# Altium PCB PCBdroneV21.PcbDoc
Units mm, origin at the board's own origin, x right, y up, seen from the top; angles counter-clockwise.
Board outline 46.33 x 95.58 mm, 2 copper layers (Top Layer, Bottom Layer); 53 components, 42 nets, 182 pads, 16 vias.
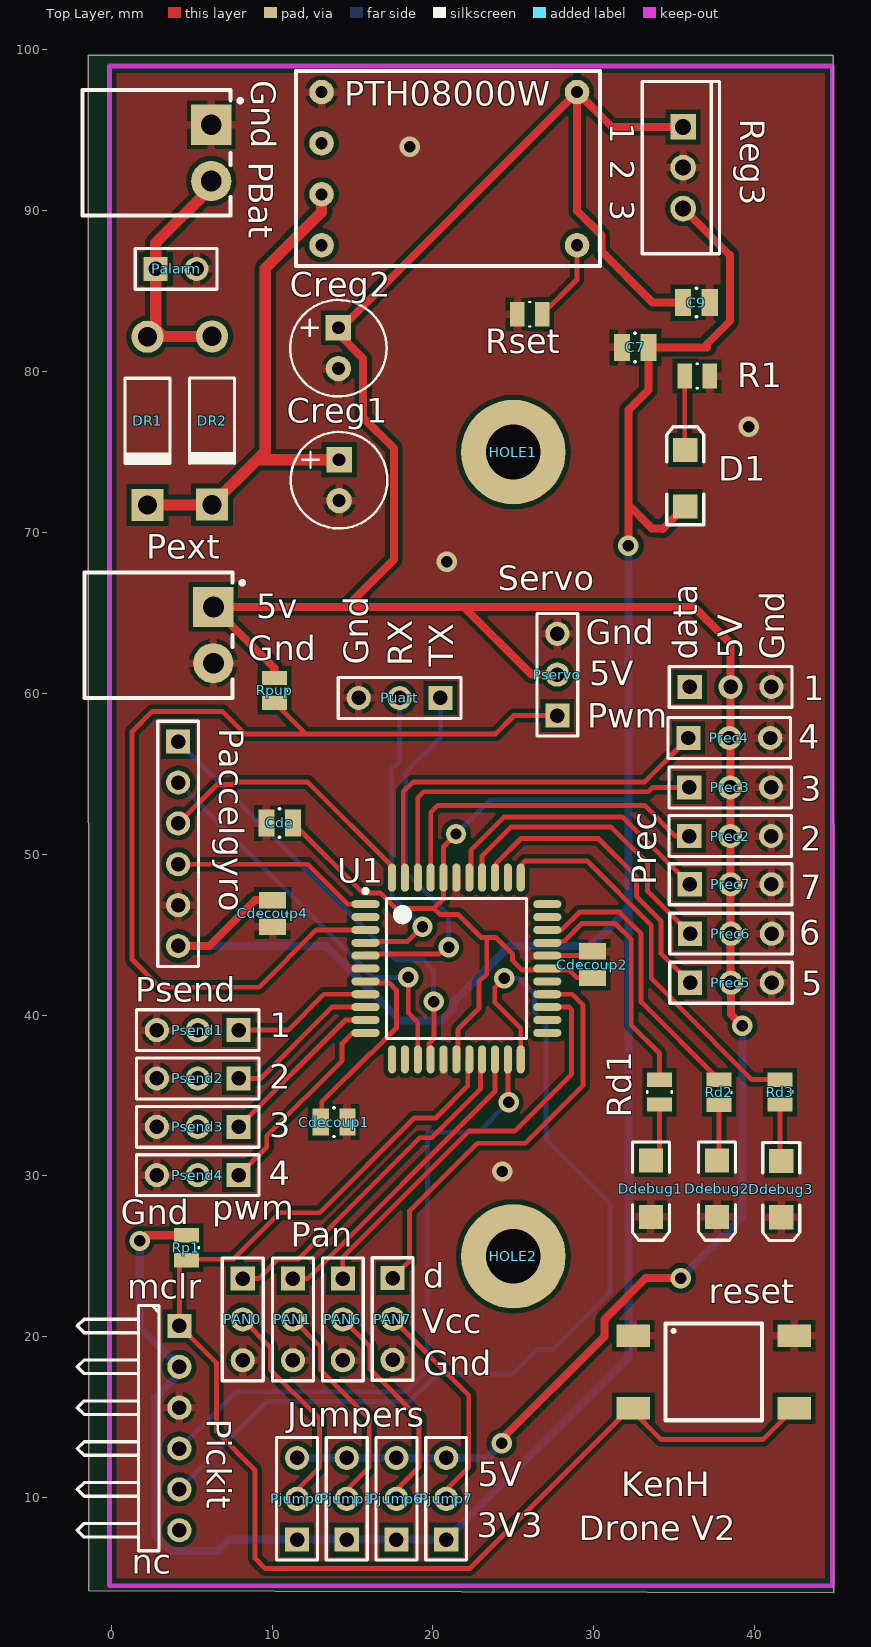
[diagram p0: Top Layer view]
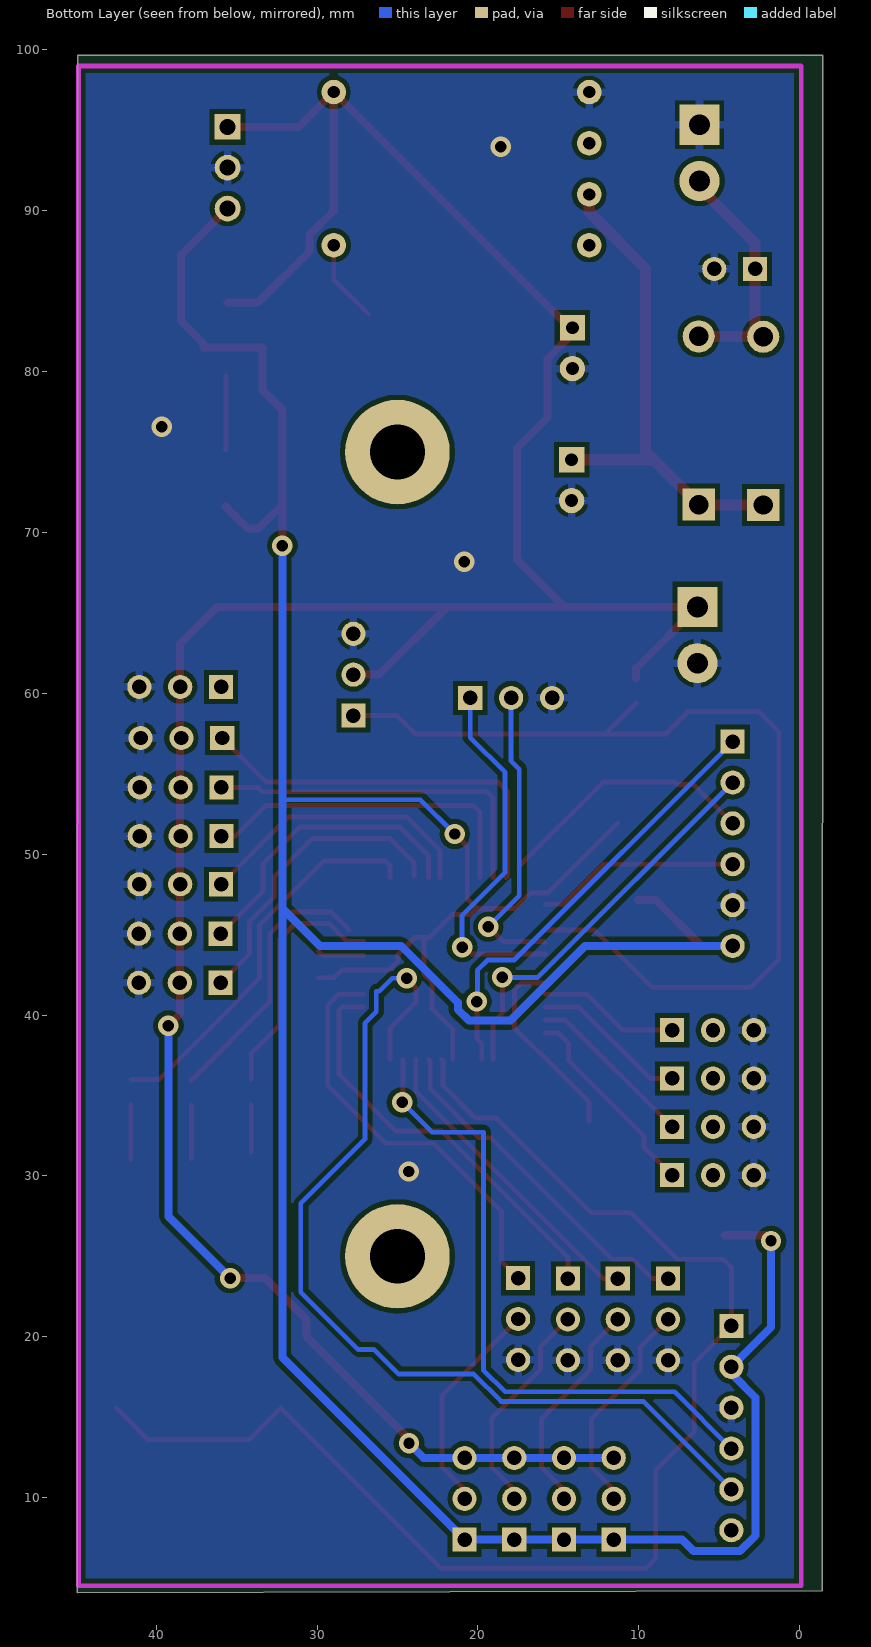
[diagram p1: Bottom Layer view, seen from below]
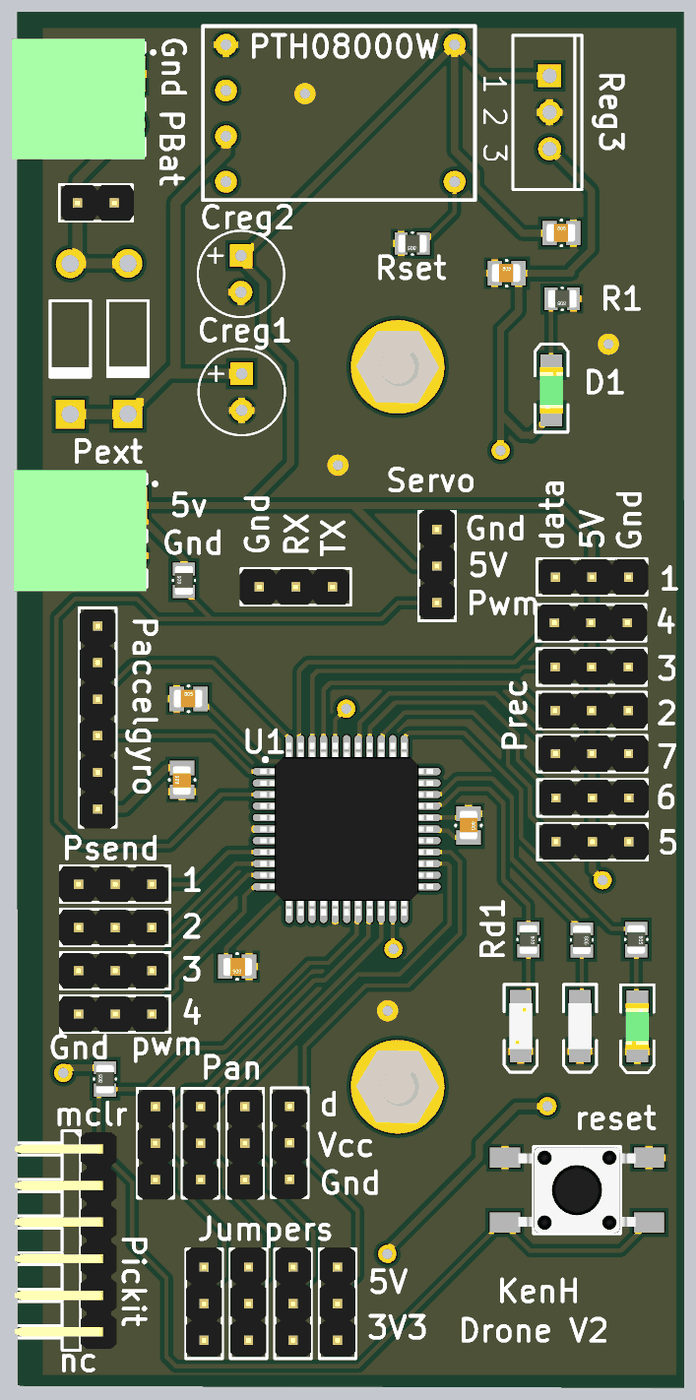
[diagram p2: 3D render of the assembled board from above, using the file's embedded part models]

## Layer stack, top to bottom
Top Solder: solder mask 0.0102, Solder Resist, Dk 3.5
Top Layer: signal copper 0.0356
Dielectric 1: dielectric 0.32, FR-4, Dk 4.8
Bottom Layer: signal copper 0.0356
Bottom Solder: solder mask 0.0102, Solder Resist, Dk 3.5

## Board outline
-1.397,4.216 44.907,4.089 44.882,99.67 -1.422,99.67

## Design rules (kind name [scope] priority, off if disabled: settings)
Clearance Clearance_1 [(InNet('5V') OR InNet('GND'))] p1: gap=0.3
Clearance [All] p2: gap=0.3
HoleSize [All] p1: absolutevalues=TRUE maxlimit=7 minlimit=0.025 maxpercent=80.000 minpercent=20.000
MinimumSolderMaskSliver [All] p1: minsoldermaskwidth=0.1
PolygonConnect [All] p1: connectstyle=Relief reliefconductorwidth=0.5 reliefentries=4 polygonreliefangle="90 Angle" airgapwidth=0.254
RoomDefinition DroneSch [InComponentClass('DroneSch')] p1: confinementstyle=ConfineIn formatcopy=TRUE lockcomponents=FALSE outline -4.826,4.724 44.704,4.724 44.704,98.679 -4.826,98.679
RoomDefinition DroneRegul [InComponentClass('DroneRegul')] p2: confinementstyle=ConfineIn formatcopy=TRUE lockcomponents=FALSE outline -4.826,68.931 39.243,68.931 39.243,99.03 -4.826,99.03
RoutingCorners [All] p1: cornerstyle=Round minsetback=2.54 maxsetback=2.54
RoutingVias [All] p1: holewidth=0.6 width=1 viastyle="Through Hole" minholewidth=0.711 minwidth=1.27 maxholewidth=0.711 maxwidth=1.27
SilkToSilkClearance [All] p1: silktosilkclearance=0.1
SilkToSolderMaskClearance [IsPad] p1: minsilkscreentomaskgap=0.254 clearancetoexposedcopper=FALSE
SolderMaskExpansion [All] p1: expansion=0.102
Width Width_2 [(InNet('BAT') OR InNet('NetDR1_1'))] p1: maxlimit=1 minlimit=0.7 preferedwidth=1
Width Width_1 [InNet('5V') OR InNet('3V3')] p2: maxlimit=0.7 minlimit=0.3 preferedwidth=0.5
Width [All] p3: maxlimit=0.3 minlimit=0.3 preferedwidth=0.3
25 further rules are at their usual default settings.

## Classes and differential pairs
component class DroneRegul: C7 C9 Creg1 Creg2 D1 DR1 DR2 Palarm Pbat PTH08000W R1 Reg3 Rset
component class DroneSch: Cde Cdecoup1 Cdecoup2 Cdecoup4 Ddebug1 Ddebug2 Ddebug3 HOLE1 HOLE2 Paccelgyro PAN0 PAN1 PAN6 PAN7 Pext Pickit Pjump0 Pjump1 Pjump6 Pjump7 Prec Prec2 Prec3 Prec4 Prec5 Prec6 Prec7 Psend1 Psend2 Psend3 Psend4 Pservo Puart Rd1 Rd2 Rd3 reset Rp1 Rpup U1

## Components (designator, comment, footprint, x,y, rotation, side; value= is the part's Value field where it differs from the comment)
C7 "CAP" C0805C 31.75,81.504 r0 top
C9 "CAP" C0805C 35.56,84.298 r0 top
Cde "CAP" C0805C 9.652,51.943 r0 top
Cdecoup1 "CAP" C0805C 14.681,33.35 r180 top
Cdecoup2 "CAP" C0805C 29.921,43.967 r270 top
Cdecoup4 "CAP" C0805C 10.033,45.491 r90 top
Creg1 "CAP Pol" RB.1/.3 14.173,74.524 r90 top
Creg2 "CAP Pol" RB.1/.3 14.122,82.728 r90 top
D1 "LED2" LED1206G 35.687,73.376 r90 top
Ddebug1 "LED" LED1206R 33.553,29.21 r270 top
Ddebug2 "LED" LED1206Y 37.668,29.21 r270 top
Ddebug3 "LED" LED1206G 41.656,29.185 r270 top
DR1 "Diode 1N4001" DO-41 2.261,76.937 r270 top
DR2 "Diode 1N4001" DO-41 6.274,76.962 r270 top
HOLE1 "Hole" SCREW 25,75 r0 top
HOLE2 "Hole" SCREW 25,25 r0 top
Paccelgyro "Header femelle" HDR1X6 4.166,56.998 r270 top
Palarm "alarme batterie faible" HDR1X2 2.769,86.385 r0 top
PAN0 "Header 3" HDR1X3 8.179,23.622 r270 top
PAN1 "Header 3" HDR1X3 11.303,23.622 r270 top
PAN6 "Header 3" HDR1X3 14.402,23.622 r270 top
PAN7 "Header 3" HDR1X3 17.501,23.647 r270 top
PBat "Batterie" TERM2W-3.5 6.223,95.347 r270 top (schematic designator P1)
Pext "Header 2" TERM2W-3.5 6.35,65.375 r270 top
Pickit "PICkit" HDR1X6H 4.242,20.676 r270 top
Pjump0 "Header 3" HDR1X3 11.557,7.391 r90 top
Pjump1 "Header 3" HDR1X3 14.647,7.391 r90 top
Pjump6 "Header 3" HDR1X3 17.738,7.391 r90 top
Pjump7 "Header 3" HDR1X3 20.828,7.391 r90 top
Prec "Header bat" HDR1X3 35.966,60.401 r0 top (schematic designator Prec1)
Prec2 "Header thro" HDR1X3 35.941,51.13 r0 top
Prec3 "Header aile" HDR1X3 35.941,54.153 r0 top
Prec4 "Header elev" HDR1X3 35.89,57.226 r0 top
Prec5 "Header rudd" HDR1X3 35.992,42.012 r0 top
Prec6 "Header gear" HDR1X3 35.992,45.06 r0 top
Prec7 "Header aux1" HDR1X3 35.966,48.133 r0 top
Psend1 "Header 3" HDR1X3 7.925,39.065 r180 top
Psend2 "Header 3" HDR1X3 7.925,36.06 r180 top
Psend3 "Header 3" HDR1X3 7.925,33.054 r180 top
Psend4 "Header 3" HDR1X3 7.925,30.048 r180 top
Pservo "Header 3" HDR1X3 27.737,58.623 r90 top
PTH08000W "Reg1" PTH08000W 13.081,97.379 r0 top
Puart "Header 3" HDR1X3 20.472,59.715 r180 top
R1 "RES" C0805R 37.211,79.726 r180 top
Rd1 "RES" C0805R 34.087,35.992 r270 top
Rd2 "RES" C0805R 37.795,35.966 r270 top
Rd3 "RES" C0805R 41.58,35.992 r270 top
Reg3 "LM2937IMP-3.3" TO-220-AB 35.56,92.68 r270 top
reset "SPST-NO" SPST-NO 32.461,20.066 r270 top
Rp1 "RES" C0805R 4.674,24.765 r90 top
Rpup "RES" C0805R 10.16,59.406 r90 top
Rset "RES" C0805R 26.797,83.566 r180 top
U1 "dsPIC33FJ64MC804-I/PT" TQFP-PT44_N 21.463,42.896 r0 top

## Footprints (in the part's own frame and the unit in brackets; to place one, negate y for a bottom-side part, rotate by r counter-clockwise, add the part's x,y. Pads: shape width x height; smd on the part's side, far side on the other; paste and mask are expansions set on the pad)
C0805C [mm]
  rect 1x1.7 smd: 1(0,0) 2(1.65,0)
  silkscreen extent 0.8,-0.89 0.85,0.89, body extent -0.21,-0.61 1.79,0.64, height 0.78
C0805R [mm]
  rect 0.9x1.55 smd: 1(0,0) 2(1.55,0)
  silkscreen extent 0.73,-0.76 0.81,0.76, body extent -0.24,-0.62 1.76,0.63, height 0.78
DO-41 [mm] "Diode, Axial; Body 5.2 x 2.7 mm (LxDia. max), Lead Dia. 0.86 mm (max)"
  round 2 hole 1.2: 1(-5.23,0)
  rect 2x2 hole 1.2: 2(5.23,0)
  silkscreen extent -2.65,-1.4 2.75,1.4
HDR1X2 [mm] "Connector; Header; 2 Position"
  rect 1.5x1.5 hole 0.9: 1(0,0)
  round 1.5 hole 0.9: 2(2.54,0)
  silkscreen extent -1.27,-1.27 3.81,1.27, body extent -1.17,-1.25 3.91,1.25, height 8.2
HDR1X3 [mm] "Connector; Header; 3 Position"
  rect 1.5x1.5 hole 0.9: 1(0,0)
  round 1.5 hole 0.9: 2(2.54,0) 3(5.08,0)
  silkscreen extent -1.27,-1.27 6.35,1.27, body extent -1.17,-1.25 6.45,1.25, height 8.2
HDR1X6 [mm] "Connector; Header; 6 Position"
  rect 1.5x1.5 hole 0.9: 1(0,0)
  round 1.5 hole 0.9: 2(2.54,0) 3(5.08,0) 4(7.62,0) 5(10.16,0) 6(12.7,0)
  silkscreen extent -1.27,-1.27 13.97,1.27, body extent -1.17,-1.25 14.07,1.25, height 8.2
HDR1X6H [mm] "Connector; Header; 6 Position; Right Angle"
  rect 1.5x1.5 hole 0.9: 1(0,0)
  round 1.5 hole 0.9: 2(2.54,0) 3(5.08,0) 4(7.62,0) 5(10.16,0) 6(12.7,0)
  silkscreen extent -1.27,-6.35 13.97,-1.27, body extent -1.17,-5.85 13.87,1.25, height 5.42
LED1206G [mm] "SMT LED; 2 Flat Leads; 3.2X1.6X1.1"
  rect 1.5x1.5 smd: 1(-1.75,0) 2(1.75,0)
  silkscreen extent -2.9,-1.15 3.2,1.15, body extent -1.6,-0.8 1.6,0.8, height 1.11
LED1206R [mm] "SMT LED; 2 Flat Leads; 3.2X1.6X1.1"
  rect 1.5x1.5 smd: 1(-1.75,0) 2(1.75,0)
  silkscreen extent -2.9,-1.15 3.2,1.15, body extent -1.6,-0.8 1.6,0.8, height 1.11
LED1206Y [mm] "SMT LED; 2 Flat Leads; 3.2X1.6X1.1"
  rect 1.5x1.5 smd: 1(-1.75,0) 2(1.75,0)
  silkscreen extent -2.9,-1.15 3.2,1.15, body extent -1.6,-0.8 1.6,0.8, height 1.11
PTH08000W [mil]
  round 60 hole 30: 1(0,0) 2(0,-125.2) 3(0,-250.39) 4(0,-374.8) 5(625.2,-374.8) 6(625.2,0)
  silkscreen extent -63,-425 681,51
RB.1/.3 [mil]
  rect 62x62 hole 31.5: 1(0,0)
  round 62 hole 31.5: 2(-100,0)
  silkscreen extent -168,-118 68,118
SCREW [mm] "Mounting Hole M3"
  round 6.5 hole 3.4: 1(0,0)
  body extent -2.89,-2.52 2.89,2.52, height 10
SPST-NO [mm] "Tactile Switch SPST-NO 6x6mm"
  rect 1.4x2.1 smd: 1(0,0) 2(4.5,0) 3(4.5,10) 4(0,10)
  silkscreen extent -0.75,2 5.25,8, body extent -0.75,0.93 5.25,9.08, height 5
TERM2W-3.5 [mm] "Horizontal Terminal Block, 2 ways, 3.5mm; Model 20.155MH/2"
  rect 2.5x2.5 hole 1.3: 1(0,0)
  round 2.5 hole 1.3: 2(3.5,0)
  silkscreen extent -2.15,-8 5.65,1.9, body extent -2.45,-8 5.95,1.2, height 7.25
TO-220-AB [mm] "TO, Thru-Hole, Vertical, Heatsink Mounted; 3 In-Line Leads; Pitch 2.54 mm"
  rect 1.6x1.6 hole 1: 1(-2.54,0)
  round 1.6 hole 1: 2(0,0) 3(2.54,0)
  silkscreen extent -5.35,-2.55 5.35,2.25
TQFP-PT44_N [mm] "Thin QFP, 44-Leads, Body 10x10mm, Pitch 0.8mm, IPC Medium Density"
  oval 1.75x0.5 smd: 1(-5.65,4) 2(-5.65,3.2) 3(-5.65,2.4) 4(-5.65,1.6) 5(-5.65,0.8) 6(-5.65,0) 7(-5.65,-0.8) 8(-5.65,-1.6) 9(-5.65,-2.4) 10(-5.65,-3.2) 11(-5.65,-4) 23(5.65,-4) 24(5.65,-3.2) 25(5.65,-2.4) 26(5.65,-1.6) 27(5.65,-0.8) 28(5.65,0) 29(5.65,0.8) 30(5.65,1.6) 31(5.65,2.4) 32(5.65,3.2) 33(5.65,4)
  oval 0.5x1.75 smd: 12(-4,-5.65) 13(-3.2,-5.65) 14(-2.4,-5.65) 15(-1.6,-5.65) 16(-0.8,-5.65) 17(0,-5.65) 18(0.8,-5.65) 19(1.6,-5.65) 20(2.4,-5.65) 21(3.2,-5.65) 22(4,-5.65) 34(4,5.65) 35(3.2,5.65) 36(2.4,5.65) 37(1.6,5.65) 38(0.8,5.65) 39(0,5.65) 40(-0.8,5.65) 41(-1.6,5.65) 42(-2.4,5.65) 43(-3.2,5.65) 44(-4,5.65)
  silkscreen extent -5.77,-4.35 4.35,4.95, body extent -6,-6 6,6, height 1.05

## Part data
C7 C9 Cde Cdecoup1 Cdecoup2 Cdecoup4: "Capacitor"
Creg1 Creg2: "Polarized Capacitor"
D1: "Typical RED, GREEN, YELLOW, AMBER GaAs LED"
Ddebug1 Ddebug2 Ddebug3: "Typical LED"
DR1 DR2: "1 Amp General Purpose Rectifier"
HOLE1 HOLE2: "Mounting Hole for screws"
Paccelgyro: library part "Header 6", "Header, 6-Pin"
Palarm PBat: library part "Header 2", "Header, 2-Pin"
PAN0 PAN1 PAN6 PAN7 Pjump0 Pjump1 Pjump6 Pjump7 Psend1 Psend2 Psend3 Psend4 Pservo Puart: "Header, 3-Pin"
Pext: "Header, 2-Pin"
Pickit: library part "Header ICSP", "Header, 6-Pin, Right Angle"
Prec Prec2 Prec3 Prec4 Prec5 Prec6 Prec7: library part "Header 3", "Header, 3-Pin"
PTH08000W: library part PTH08000W
R1 Rd1 Rd2 Rd3 Rp1 Rpup Rset: "Resistor"
Reg3: "500 mA Low Dropout Regulator"
reset: "Tactile Switch 7.3mm, SMD"
U1: "High-Performance 16-bit Digital Signal Controller, 64 KB Flash, 16 KB RAM, 44-Pin TQFP, Industrial Temperature"

## Via types
v1: diameter 1.27, hole 0.711, Top Layer to Bottom Layer, 16 vias

## Nets (pads, with @x,y where several pads share a name; then routed paths per layer and width w, separated by ;. In a path a pad name is that pad's centre, name@x,y a point inside that pad or via, vN(x,y) a via of type N, cw(c..) or ccw(c..) an arc to the next point about the centre after c; other vN are vias at no path point)
3V3: C7.2 Cde.2 Cdecoup2.2 Cdecoup4.2 D1.1 Paccelgyro.6 Pickit.2 Pjump0.1 Pjump1.1 Pjump6.1 Pjump7.1 Reg3.3 Rp1.2 U1.17 U1.28 U1.40 | length 227.6
  Top Layer w0.3: Cde.2 15.649,47.596 16.728,47.596 17.69,46.634 20.066,46.634 ; v1(21.438,51.257) 20.663,50.483 U1.40 20.663,47.18 20.637,47.206 20.066,46.634 ; U1.17@21.563,37.246 21.563,39.114 22.86,40.411 22.86,42.062 23.35,42.552 23.35,44.722 23.451,44.824 ; 23.02,44.824 21.59,46.253 20.447,46.253 20.066,46.634 ; 23.045,44.824 23.451,44.824 ; Cdecoup2.2 28.955,42.317 28.476,42.796 27.113,42.796 25.555,42.796 24.96,43.391 24.96,43.772 23.909,44.824 23.451,44.824
  Top Layer w0.5: v1(1.778,25.959) 2.134,26.315 Rp1.2 ; Paccelgyro.6 6.096,44.298 8.94,47.141 Cdecoup4.2 ; v1(32.156,69.19) 32.156,71.73 ; Reg3.3 38.46,87.24 38.46,83.137 37.054,81.731 37.054,81.504 C7.2 33.4,78.866 32.156,77.622 32.156,71.73 ; D1.1 34.267,70.206 34.216,70.256 33.63,70.256 32.156,71.73
  Bottom Layer w0.3: v1(21.438,51.257) 23.571,53.391 32.156,53.391
  Bottom Layer w0.5: v1(1.778,25.959) 1.778,20.599 Pickit.2 ; Paccelgyro.6 13.336,44.298 17.975,39.658 20.557,39.658 21.251,40.352 21.251,40.783 24.766,44.298 29.82,44.298 32.156,46.634 ; Pickit.2@4.242,17.717 2.742,16.217 2.742,7.637 3.703,6.676 6.591,6.676 7.307,7.391 Pjump0.1 Pjump1.1 Pjump6.1 Pjump7.1 32.156,18.72 32.156,46.634 ; v1(32.156,69.19) 32.156,53.391 32.156,46.634
5V: C9.1 Creg2.1 Pext.1 Pjump0.3 Pjump1.3 Pjump6.3 Pjump7.3 Prec2.2 Prec3.2 Prec4.2 Prec5.2 Prec6.2 Prec7.2 Prec.2 Pservo.2 PTH08000W.6 Reg3.1 Rpup.2 | length 182.4
  Top Layer w0.5: Rpup.2 10.16,61.565 Pext.1 14.626,65.375 ; Creg2.1 14.122,82.362 15.66,80.825 15.66,77.152 17.577,75.235 17.577,68.326 14.626,65.375 ; Creg2.1@14.31,82.728 PTH08000W.6 ; v1(24.282,13.386) 24.282,13.64 30.661,20.019 30.661,21.077 33.232,23.647 v1(35.408,23.647) ; Pservo.2 26.132,61.163 21.92,65.375 ; C9.1 33.66,84.298 30.473,87.485 30.473,88.485 28.961,89.997 PTH08000W.6 ; Reg3.1 31.12,95.22 PTH08000W.6 ; v1(39.243,39.345) 38.532,40.056 Prec5.2 38.506,42.037 Prec7.2 Prec.2 38.506,63.094 36.225,65.375 21.92,65.375 ; 14.626,65.375 21.92,65.375
  Bottom Layer w0.5: Pjump0.3 Pjump1.3 Pjump6.3 Pjump7.3 23.368,12.471 v1(24.282,13.386) ; v1(35.408,23.647) 39.243,27.483 v1(39.243,39.345)
AN0: PAN0.1 U1.19 | length 21.5
  Top Layer w0.3: PAN0.1 9.167,23.622 10.367,24.822 11.639,24.822 19.196,32.379 19.933,32.379 22.963,35.409 22.963,37.146 U1.19
AN1: PAN1.1 U1.20 | length 19.4
  Top Layer w0.3: PAN1.1 12.217,23.622 23.863,35.268 U1.20
AN6: PAN6.1 U1.25 | length 25.9
  Top Layer w0.3: PAN6.1 14.402,24.958 22.235,32.791 25.095,32.791 28.626,36.322 28.626,40.335 28.465,40.496 U1.25
AN7: PAN7.1 U1.26 | length 26.1
  Top Layer w0.3: PAN7.1 18.542,24.689 18.542,27.813 22.758,32.029 25.73,32.029 29.337,35.636 29.337,40.615 28.656,41.296 U1.26
BAT: Creg1.1 DR1.2 DR2.2 PTH08000W.3 | length 31.2
  Top Layer w0.7: DR1.2 6.248,71.707 DR2.2 9.065,74.524 ; PTH08000W.3 13.081,89.916 9.576,86.411 9.576,75.034 9.065,74.524 ; Creg1.1 9.065,74.524
GND: C7.1 C9.2 Cde.1 Cdecoup1.1 Cdecoup2.1 Cdecoup4.1 Creg1.2 Creg2.2 Ddebug1.2 Ddebug2.2 Ddebug3.2 Paccelgyro.5 Palarm.2 PAN0.3 PAN1.3 PAN6.3 PAN7.3 PBat.1 Pext.2 Pickit.3 Prec2.3 Prec3.3 Prec4.3 Prec5.3 Prec6.3 Prec7.3 Prec.3 Psend1.3 Psend2.3 Psend3.3 Psend4.3 Pservo.3 PTH08000W.1 Puart.3 R1.1 Reg3.2 reset.1 reset.4 Rset.2 U1.6 U1.16 U1.29 U1.39 | length 2.9
  Top Layer w0.3: U1.29 29.65,43.696 Cdecoup2.1
  other v1: 24.308,30.277 20.853,68.174 39.649,76.581 18.567,93.98
I2CSCL: Paccelgyro.3 U1.44 | length 16.5
  Top Layer w0.3: Paccelgyro.3 6.579,54.331 7.59,54.331 7.743,54.483 12.217,54.483 U1.44@17.463,49.237
I2CSDA: Paccelgyro.4 U1.1 | length 12.7
  Top Layer w0.3: Paccelgyro.4 12.217,49.378 14.699,46.896 U1.1
ICAILE: Prec3.1 U1.42 | length 22.1
  Top Layer w0.3: U1.42 19.063,53.505 19.441,53.883 33.396,53.883 33.665,54.153 Prec3.1
ICAUX1: Prec7.1 U1.38 | length 17.9
  Top Layer w0.3: U1.38@22.363,48.546 22.363,50.252 24.435,52.324 31.775,52.324 Prec7.1
ICELEV: Prec4.1 U1.43 | length 24.5
  Top Layer w0.3: U1.43 18.163,48.646 18.163,49.461 18.161,49.463 18.161,53.899 18.745,54.483 33.147,54.483 Prec4.1
ICGEAR: Prec6.1 U1.37 | length 18.8
  Top Layer w0.3: U1.37 23.063,49.911 24.841,51.689 31.09,51.689 33.35,49.428 33.35,47.701 Prec6.1
ICRUDD: Prec5.1 U1.36 | length 19.1
  Top Layer w0.3: U1.36@23.963,48.646 23.963,49.461 25.48,50.978 30.286,50.978 32.664,48.6 32.664,47.356 34.188,45.832 34.188,43.815 Prec5.1
ICTHRO: Prec2.1 U1.41 | length 21.1
  Top Layer w0.3: U1.41 19.863,52.604 20.295,53.035 33.172,53.035 35.077,51.13 Prec2.1
INT0ACCEL: Paccelgyro.1 U1.15 | length 27.4
  Top Layer w0.3: U1.15@19.763,37.246 19.763,38.244 20.066,38.547 v1(20.066,40.843)
  Bottom Layer w0.3: Paccelgyro.1 17.736,43.427 19.398,43.427 20.033,42.791 20.033,40.876 v1(20.066,40.843)
INT1ACCEL: Paccelgyro.2 U1.14 | length 24.7
  Top Layer w0.3: v1(18.476,42.342) 18.466,42.331 18.466,40.157 19.063,39.56 U1.14
  Bottom Layer w0.3: Paccelgyro.2 16.281,42.342 v1(18.476,42.342)
MCLR: Pickit.1 reset.2 reset.3 Rp1.1 U1.18 | length 83.9
  Top Layer w0.3: U1.18 22.163,37.146 22.163,35.6 20.168,33.604 18.847,33.604 12.954,27.711 10.49,27.711 7.601,24.822 4.731,24.822 Rp1.1 4.242,24.333 Pickit.1 6.553,18.364 6.553,14.097 8.941,11.709 8.941,6.223 9.576,5.588 22.276,5.588 32.254,15.566 34.205,13.614 40.51,13.614 reset.3
NetCdecoup1_2: Cdecoup1.2 U1.7 | length 12.3
  Top Layer w0.3: Cdecoup1.2@13.094,33.413 13.094,34.608 16.13,37.644 16.13,37.598 17.729,39.197 17.729,41.554 17.288,41.996 U1.7@15.813,41.996
NetD1_2: D1.2 R1.2 | length 4.6
  Top Layer w0.3: R1.2 35.661,75.152 D1.2
NetDdebug1_1: Ddebug1.1 Rd1.2 | length 2.9
  Top Layer w0.3: Ddebug1.1@34.087,31.493 Rd1.2
NetDdebug2_1: Ddebug2.1 Rd2.2 | length 3.3
  Top Layer w0.3: Ddebug2.1@37.795,31.087 Rd2.2
NetDdebug3_1: Ddebug3.1 Rd3.2 | length 3.4
  Top Layer w0.3: Ddebug3.1@41.58,31.011 Rd3.2
NetDR1_1: DR1.1 DR2.1 Palarm.1 PBat.2 | length 14.3
  Top Layer w0.7: PBat.2 6.223,91.44 2.769,87.986 Palarm.1 2.769,82.675 3.251,82.192 DR2.1
NetPAN0_2: PAN0.2 Pjump0.2 | length 13.7
  Top Layer w0.3: PAN0.2 9.903,19.358 9.903,17.962 12.957,14.908 12.957,11.892 11.557,10.492 Pjump0.2
NetPAN1_2: PAN1.2 Pjump1.2 | length 13.7
  Top Layer w0.3: PAN1.2 13.002,19.383 13.002,17.962 16.047,14.917 16.047,11.892 14.647,10.492 Pjump1.2
NetPAN6_2: PAN6.2 Pjump6.2 | length 13.7
  Top Layer w0.3: PAN6.2 16.101,19.383 16.101,17.987 19.138,14.95 19.138,11.892 17.738,10.492 Pjump6.2
NetPAN7_2: PAN7.2 Pjump7.2 | length 13.7
  Top Layer w0.3: PAN7.2 22.228,16.38 22.228,11.892 20.828,10.492 Pjump7.2
NetPTH08000W_5: PTH08000W.5 Rset.1 | length 5.2
  Top Layer w0.3: Rset.1 28.961,85.73 PTH08000W.5
NetRd1_1: Rd1.1 U1.30 | length 15.5
  Top Layer w0.3: U1.30@27.113,44.596 28.154,44.596 29.252,45.695 31.344,45.695 32.334,44.704 32.334,39.375 34.087,37.622 Rd1.1
NetRd2_1: Rd2.1 U1.31 | length 17.1
  Top Layer w0.3: 28.005,45.296 29.115,46.406 31.598,46.406 32.944,45.06 32.944,40.818 Rd2.1
NetRd3_1: Rd3.1 U1.34 | length 24.6
  Top Layer w0.3: U1.34 25.463,49.288 25.756,49.581 29.591,49.581 33.579,45.593 33.579,42.288 35.055,40.812 35.055,40.764 39.827,35.992 Rd3.1
PGC1: Pickit.5 U1.22 | length 60.7
  Top Layer w0.3: v1(24.435,42.291) 23.851,41.707 23.851,40.792 25.463,39.18 U1.22
  Bottom Layer w0.3: Pickit.5 9.712,15.986 18.562,15.986 20.26,17.684 24.923,17.684 26.441,19.202 27.432,19.202 31.013,22.784 31.013,28.296 27.026,32.283 27.026,39.497 26.314,40.208 26.314,41.478 26.137,41.478 25.324,42.291 v1(24.435,42.291)
PGD1: Pickit.4 U1.21 | length 40.7
  Top Layer w0.3: U1.21 24.663,34.621 v1(24.714,34.569)
  Bottom Layer w0.3: Pickit.4 7.772,16.586 18.313,16.586 19.66,17.932 19.66,32.715 22.845,32.715 24.699,34.569 v1(24.714,34.569)
PWM1: Psend1.1 U1.8 | length 8.8
  Top Layer w0.3: Psend1.1 10.998,39.065 13.229,41.296 U1.8
PWM2: Psend2.1 U1.9 | length 9.7
  Top Layer w0.3: Psend2.1 9.288,36.06 13.724,40.496 U1.9
PWM3: Psend3.1 U1.10 | length 10.6
  Top Layer w0.3: Psend3.1 14.567,39.696 U1.10
PWM4: Psend4.1 U1.11 | length 12.6
  Top Layer w0.3: Psend4.1 9.677,31.801 9.677,32.487 14.357,37.166 14.357,38.233 15.02,38.896 U1.11
PWMSERVO: Pservo.1 Rpup.1 U1.3 | length 61.6
  Top Layer w0.3: Rpup.1 12.086,57.48 ; U1.3 12.759,45.296 9.195,41.732 3.023,41.732 1.295,43.459 1.295,57.607 2.565,58.877 6.909,58.877 8.306,57.48 12.086,57.48 ; Pservo.1 25.044,58.623 23.901,57.48 12.086,57.48
RX: Puart.2 U1.4 | length 19.2
  Top Layer w0.3: U1.4 15.894,44.577 18.44,44.577 v1(19.355,45.491)
  Bottom Layer w0.3: Puart.2 17.932,55.778 17.424,55.27 17.424,47.422 v1(19.355,45.491)
TX: Puart.1 U1.5 | length 22.8
  Top Layer w0.3: U1.5@15.813,43.796 20.377,43.796 v1(20.98,44.221)
  Bottom Layer w0.3: Puart.1 20.472,57.251 18.313,55.092 18.313,48.87 20.98,46.203 v1(20.98,44.221)
pads on no net: HOLE1.1 HOLE2.1 Pickit.6 Prec.1 Psend1.2 Psend2.2 Psend3.2 Psend4.2 PTH08000W.2 PTH08000W.4 U1.2 U1.12 U1.13 U1.23 U1.24 U1.27 U1.32 U1.33 U1.35

## Polygon pours and split planes (outlines as drawn)
GND on Bottom Layer "Top Layer-No Net" (solid, pour order 8): 0.203,99 44.831,99 44.831,4.521 -0.097,4.521
GND on Top Layer "Top Layer-No Net" (solid, pour order 6): 44.704,98.679 44.383,99 -0.097,99 -0.097,4.521 0.106,4.724 44.704,4.724

## Keep-outs
Keep-Out Layer:
  lines w0.3: -0.097,4.521 44.831,4.521 44.831,79.472 44.831,99 -0.097,99 -0.097,4.521

## Silkscreen, mask and mechanical layers (free items; w line width, h text height)
Top Overlay:
  text "Gnd" at 8.712,98.12 h1.52 r270
  text "Servo" at 24.028,66.396 h1.52
  text "5v" at 9.017,64.668 h1.52
  text "Gnd" at 29.515,63.068 h1.52
  text "5V" at 39.243,62.154 h1.52 r90
  text "data" at 36.449,62.103 h1.52 r90
  text "Gnd" at 41.834,62.078 h1.52 r90
  text "Gnd" at 8.484,62.052 h1.52
  text "Gnd" at 15.977,61.773 h1.52 r90
  text "RX" at 18.72,61.697 h1.52 r90
  text "TX" at 21.26,61.646 h1.52 r90
  text "5V" at 29.718,60.503 h1.52
  text "1" at 43.028,59.563 h1.52
  text "Pwm" at 29.591,57.861 h1.52
  text "4" at 42.723,56.566 h1.52
  text "3" at 42.85,53.315 h1.52
  text "2" at 42.824,50.216 h1.52
  text "7" at 42.85,47.193 h1.52
  text "6" at 42.774,44.374 h1.52
  text "5" at 42.901,41.224 h1.52
  text "Psend" at 1.499,40.843 h1.52
  text "1" at 9.855,38.633 h1.52
  text "2" at 9.83,35.408 h1.52
  text "3" at 9.83,32.41 h1.52
  text "4" at 9.804,29.413 h1.52
  text "pwm" at 6.274,27.28 h1.52
  text "Gnd" at 0.584,27 h1.52
  text "Pan" at 11.151,25.603 h1.52
  text "d" at 19.406,23.063 h1.52
  text "mclr" at 0.991,22.377 h1.52
  text "Vcc" at 19.304,20.218 h1.52
  text "Gnd" at 19.406,17.602 h1.52
  text "Jumpers" at 10.947,14.402 h1.52
  text "5V" at 22.784,10.719 h1.52
  text "KenH" at 31.725,10.084 h1.52
  text "3V3" at 22.733,7.544 h1.52
  text "Drone V2" at 29.058,7.341 h1.52
  text "nc" at 1.295,5.283 h1.52
Drill Drawing:
  text ".LEGEND" at 4.064,76.551 h1.52
  text "Drill Drawing." at 4.064,74.011 h1.52

## Dimensions
-0.097,4.521 to -0.097,99 on Mechanical 1
-0.097,99 to 44.831,99 on Mechanical 1

## Text inside footprints (layer, text, board x,y; h text height)
Reg3: Top Overlay "3" at 31.035,90.64 h1.5 r270; Top Overlay "2" at 31.035,93.18 h1.5 r270; Top Overlay "1" at 31.035,95.47 h1.5 r270